# Altium PCB THIETBINHIPTIM.PcbDoc
Units mm, origin at the board's own origin, x right, y up, seen from the top; angles counter-clockwise.
Board outline 52.45 x 30.1 mm, 2 copper layers (Top Layer, Bottom Layer); 28 components, 23 nets, 176 pads, 23 vias.
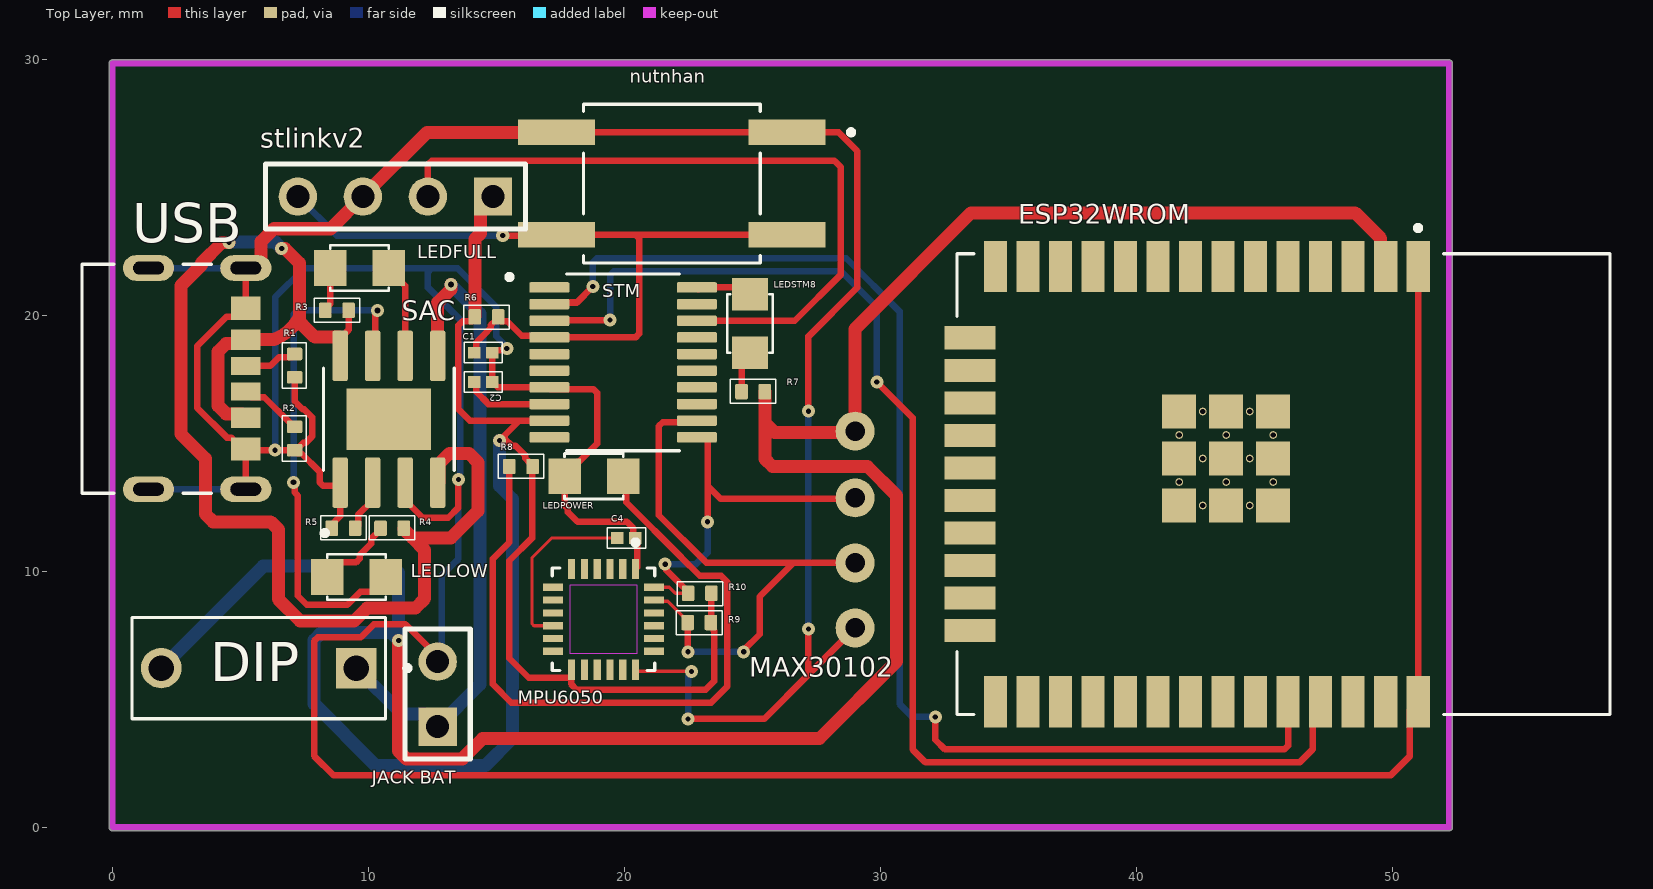
[diagram p0: Top Layer view]
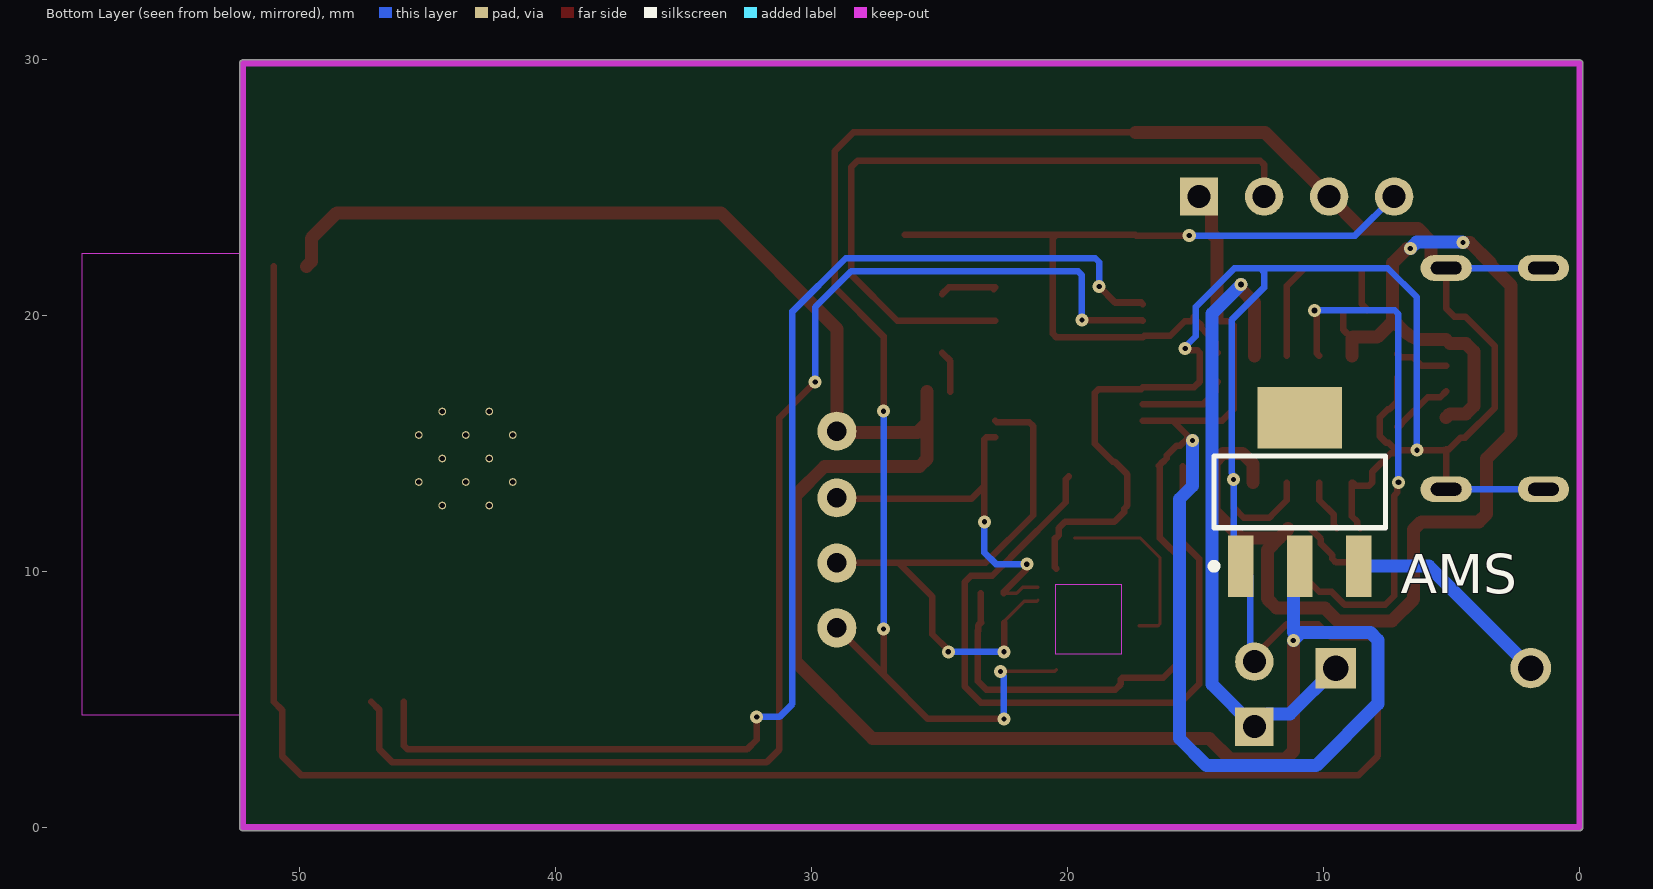
[diagram p1: Bottom Layer view, seen from below]
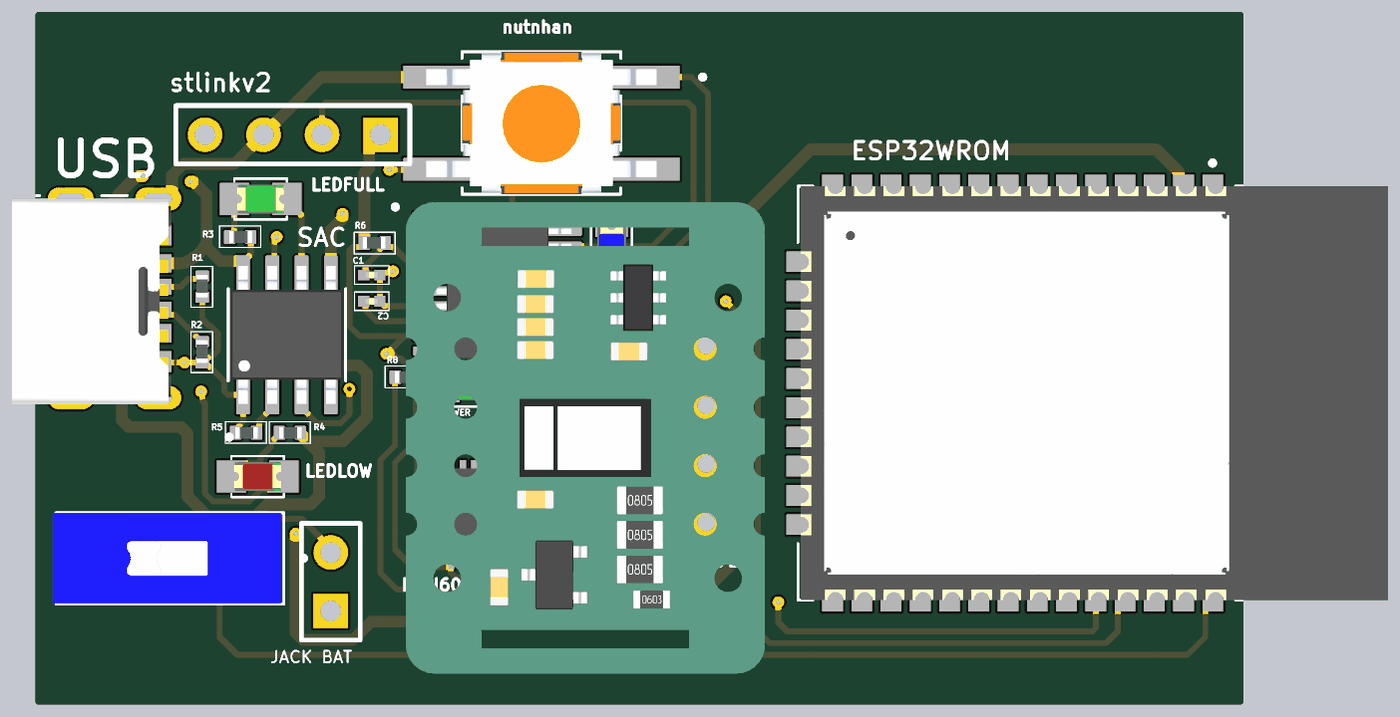
[diagram p2: 3D render of the assembled board from above, using the file's embedded part models]

## Layer stack, top to bottom
Top Solder: solder mask 0.0102, Solder Resist, Dk 3.5
Top Layer: signal copper 0.0356
Dielectric 1: dielectric 0.32, FR-4, Dk 4.8
Bottom Layer: signal copper 0.0356
Bottom Solder: solder mask 0.0102, Solder Resist, Dk 3.5

## Board outline
-0.127,0 ccw(c0,0) 0,-0.127 52.197,-0.127 ccw(c52.197,0) 52.324,0 52.324,29.845 ccw(c52.197,29.845) 52.197,29.972 0,29.972 ccw(c0,29.845) -0.127,29.845

## Design rules (kind name [scope] priority, off if disabled: settings)
Clearance [All] p1: gap=0.254 ignorepadtopadclearanceinfootprint=FALSE except(0: Arc-Hole Track-Hole SMDPad-Hole THPad-Hole Via-Hole Fill-Hole Poly-Hole Region-Hole Text-Hole)
PolygonConnect [All] p1: connectstyle=Relief reliefconductorwidth=0.254 reliefentries=4 polygonreliefangle="90 Angle" airgapwidth=0.254
RoutingVias [All] p1: holewidth=0.203 width=0.508 viastyle="Through Hole" minholewidth=0.203 minwidth=0.508 maxholewidth=0.203 maxwidth=0.508
SolderMaskExpansion [All] p1: expansion=0.102 istentingtop=FALSE
Width [All] p1: maxlimit=0.508 minlimit=0.127 preferedwidth=0.254 minimp=50.000000 maximp=50.000000 favimp=50.000000
30 further rules are at their usual default settings.

## Components (designator, comment, footprint, x,y, rotation, side; value= is the part's Value field where it differs from the comment)
AMS "AMS1117-3.3V" SOT223 10.922,13.102 r180 bottom value="AMS1117-3.3V SOT223"
C1 "100nF" "Cap 0201" 14.478,18.542 r0 top
C2 "1uF" "Cap 0201" 14.478,17.399 r180 top
C4 "0.1uF" "Cap 0201" 20.066,11.303 r0 top
DIP "DS01-254-S-01BE" SW_DS01-254-S-01BE 5.715,6.223 r90 top
ESP32WROM "ESP32 WROOM 32" ESP32-WROOM-32D 45.731,13.408 r270 top
"JACK BAT" "Header 2" HDR1X2 12.7,3.937 r90 top (schematic designator "jack bat")
LEDFULL "LED 0805" LED-0805-Green 10.795,21.844 r180 top
LEDLOW "LED 0805" LED-0805-Red 10.668,9.779 r180 top
LEDPOWER "LED 0805" LED-0805-Green 19.939,13.716 r180 top
LEDSTM8 "LED 0805" LED-0805-Blue 24.892,18.542 r90 top
MAX30102 "Component_1" PCBComponent_1 29,15.475 r0 top (schematic designator max)
MPU6050 "MPU-6050" QFN50P400X400X95-24N 19.177,8.128 r270 top
nutnhan "TL6700AF160QG" SW_TL6700AF160QG 21.844,25.146 r180 top
R1 "5.1K" "RES 0402" 7.112,18.034 r90 top
R2 "5.1K" "RES 0402" 7.112,15.187 r90 top
R3 "1K" "RES 0402" 8.763,20.193 r0 top
R4 "1K" "RES 0402" 10.922,11.684 r0 top
R5 "1.2K" "RES 0402" 9.017,11.684 r0 top
R6 "10k" "RES 0402" 14.605,19.939 r180 top
R7 "820" "RES 0402" 25.019,17.018 r0 top
R8 "1K" "RES 0402" 15.949,14.097 r0 top
R9 "4K7" "RES 0402" 22.913,8.001 r180 top
R10 "4K7" "RES 0402" 22.934,9.144 r180 top
SAC "TP4056" SOP127P600X175-9N 10.795,15.94 r90 top
stlinkv2 "Header 4" HDR1X4 14.859,24.638 r180 top
STM "STM8S003F3P6" SOP65P640X120-20N 19.939,18.161 r0 top
USB "UJC-HP-3-SMT-TR" CUI_UJC-HP-3-SMT-TR 5.207,17.526 r270 top (schematic designator J1)

## Footprints (in the part's own frame and the unit in brackets; to place one, negate y for a bottom-side part, rotate by r counter-clockwise, add the part's x,y. Pads: shape width x height; smd on the part's side, far side on the other; paste and mask are expansions set on the pad)
"Cap 0201" [mm] "Chip Capacitor, 2-Leads, Body 0.65x0.35mm, IPC Medium Density"
  rect 0.48x0.46 smd: 1(-0.35,0) 2(0.35,0)
  silkscreen extent -0.75,-0.4 0.75,0.4, body extent -0.3,-0.15 0.3,0.15, height 0.32
CUI_UJC-HP-3-SMT-TR [mm]
  rect 0.7x1.15 smd: A5(-0.5,0.005) B5(0.5,0.005)
  rect 0.8x1.15 smd: A9(1.52,0.005) B9(-1.52,0.005)
  rect 0.9x1.15 smd: A12(2.75,0.005) B12(-2.75,0.005)
  oval 1x2 hole 0.5 slot 1.2 at 90 deg: S1(-4.32,0) S2(4.32,0) S3(-4.32,-3.8) S4(4.32,-3.8)
  silkscreen extent -4.47,-6.4 4.47,-1.35, body extent -4.34,-6.35 4.6,0.55, height 3.23
ESP32-WROOM-32D [mm]
  rect 2x0.9 smd: 1(-8.5,5.26) 2(-8.5,3.99) 3(-8.5,2.72) 4(-8.5,1.45) 5(-8.5,0.18) 6(-8.5,-1.09) 7(-8.5,-2.36) 8(-8.5,-3.63) 9(-8.5,-4.9) 10(-8.5,-6.17) 11(-8.5,-7.44) 12(-8.5,-8.71) 13(-8.5,-9.98) 14(-8.5,-11.25) 25(8.5,-11.25) 26(8.5,-9.98) 27(8.5,-8.71) 28(8.5,-7.44) 29(8.5,-6.17) 30(8.5,-4.9) 31(8.5,-3.63) 32(8.5,-2.36) 33(8.5,-1.09) 34(8.5,0.18) 35(8.5,1.45) 36(8.5,2.72) 37(8.5,3.99) 38(8.5,5.26)
  rect 0.9x2 smd: 15(-5.715,-12.25) 16(-4.445,-12.25) 17(-3.175,-12.25) 18(-1.905,-12.25) 19(-0.635,-12.25) 20(0.635,-12.25) 21(1.905,-12.25) 22(3.175,-12.25) 23(4.445,-12.25) 24(5.715,-12.25)
  rect 1.33x1.33 smd: 39(-2.835,-0.405) 39(-2.835,-2.24) 39(-2.835,-4.075) 39(-1,-0.405) 39(-1,-2.24) 39(-1,-4.075) 39(0.835,-0.405) 39(0.835,-2.24) 39(0.835,-4.075)
  round 0.3 hole 0.2: 39(-2.835,-1.322) 39(-2.835,-3.157) 39(-1.917,-0.405) 39(-1.917,-2.24) 39(-1.917,-4.075) 39(-1,-1.322) 39(-1,-3.157) 39(-0.082,-0.405) 39(-0.082,-2.24) 39(-0.082,-4.075) 39(0.835,-1.322) 39(0.835,-3.157)
  Keep-Out Layer region: 9,6.45 -9,6.45 -9,12.75 9,12.75
  Keep-Out Layer region: 9,6.45 -9,6.45 -9,12.75 9,12.75
  silkscreen extent -10.1,-12.75 9,12.75, body extent -9,-12.62 9,12.88, height 3.2
HDR1X2 [mm] "Connector; Header; 2 Position"
  rect 1.5x1.5 hole 0.9: 1(0,0)
  round 1.5 hole 0.9: 2(2.54,0)
  silkscreen extent -1.27,-1.27 3.81,1.27
HDR1X4 [mm] "Connector; Header; 4 Position"
  rect 1.5x1.5 hole 0.9: 1(0,0)
  round 1.5 hole 0.9: 2(2.54,0) 3(5.08,0) 4(7.62,0)
  silkscreen extent -1.27,-1.27 8.89,1.27
LED-0805-Blue [mil]
  rect 50x55 smd: 1(0,0) 2(90,0)
  silkscreen extent 0,-35 90,35, body extent 5,-25 85,25, height 43
LED-0805-Green [mil]
  rect 50x55 smd: 1(0,0) 2(90,0)
  silkscreen extent 0,-35 90,35, body extent 5,-25 85,25, height 43
LED-0805-Red [mil]
  rect 50x55 smd: 1(0,0) 2(90,0)
  silkscreen extent 0,-35 90,35, body extent 5,-25 85,25, height 43
PCBComponent_1 [mil]
  round 60 hole 30: 1(0,0) 2(0,-102.55) 3(0,-202.55) 4(0,-302.55)
  body extent -514,-562 101,245, height 217
QFN50P400X400X95-24N [mm]
  rect 0.79x0.28 smd: 1(-1.97,1.25) 2(-1.97,0.75) 3(-1.97,0.25) 4(-1.97,-0.25) 5(-1.97,-0.75) 6(-1.97,-1.25) 13(1.97,-1.25) 14(1.97,-0.75) 15(1.97,-0.25) 16(1.97,0.25) 17(1.97,0.75) 18(1.97,1.25)
  rect 0.28x0.79 smd: 7(-1.25,-1.97) 8(-0.75,-1.97) 9(-0.25,-1.97) 10(0.25,-1.97) 11(0.75,-1.97) 12(1.25,-1.97) 19(1.25,1.97) 20(0.75,1.97) 21(0.25,1.97) 22(-0.25,1.97) 23(-0.75,1.97) 24(-1.25,1.97)
  Keep-Out Layer region: 1.35,-1.3 -1.35,-1.3 -1.35,1.3 1.35,1.3
  silkscreen extent -3.1,-2 2,2, body extent -2,-2 2,2, height 0.93
"RES 0402" [mm]
  rrect20% 0.49x0.6 smd: 1(-0.455,0) 2(0.455,0)
  silkscreen extent -0.89,-0.46 0.89,0.48, body extent -0.47,-0.25 0.53,0.25, height 0.32
SOP65P640X120-20N [mm]
  rrect25% 1.56x0.41 smd: 1(-2.88,2.925) 2(-2.88,2.275) 3(-2.88,1.625) 4(-2.88,0.975) 5(-2.88,0.325) 6(-2.88,-0.325) 7(-2.88,-0.975) 8(-2.88,-1.625) 9(-2.88,-2.275) 10(-2.88,-2.925) 11(2.88,-2.925) 12(2.88,-2.275) 13(2.88,-1.625) 14(2.88,-0.975) 15(2.88,-0.325) 16(2.88,0.325) 17(2.88,0.975) 18(2.88,1.625) 19(2.88,2.275) 20(2.88,2.925)
  silkscreen extent -4.54,-3.45 2.2,3.45, body extent -3.2,-3.25 3.2,3.25, height 1.23
SOP127P600X175-9N [mm]
  rrect25% 1.97x0.6 smd: 1(-2.475,1.905) 2(-2.475,0.635) 3(-2.475,-0.635) 4(-2.475,-1.905) 5(2.475,-1.905) 6(2.475,-0.635) 7(2.475,0.635) 8(2.475,1.905)
  rect 2.413x3.302 smd paste-3: 9(0,0)
  silkscreen extent -4.54,-2.55 2,2.6, body extent -3,-2.45 3,2.45, height 1.75
SOT223 [mm]
  rect 1x2.4 smd: 1(-2.3,-2.9) 2(0,-2.9) 3(2.3,-2.9)
  rect 3.3x2.4 smd: 4(0,2.9)
  silkscreen extent -3.48,-3.02 3.35,1.4, body extent -3.25,-3.56 3.25,3.4, height 1.68
SW_DS01-254-S-01BE [mm]
  rect 1.58x1.58 / inner round 1.58 / far side rect 1.58x1.58 hole 1: 1A(0,-3.81)
  round 1.58 hole 1: 1B(0,3.81)
  silkscreen extent -1.98,-5.9 1.98,4.95, body extent -1.98,-4.83 1.98,5.07, height 5.18
SW_TL6700AF160QG [mm]
  rect 3x1 smd: 1(-4.5,-2) 2(4.5,-2) 3(-4.5,2) 4(4.5,2)
  silkscreen extent -7.1,-3.1 3.45,3.1, body extent -5,-3.1 5,3.1, height 3.5

## Part data
AMS: library part "AMS1117 SMD", "Dán", Chung_Loai=Dán, Don_Vi=Con, Ma_Hang=MH000596
C1 C2 C4: library part "Cap 0201", "Capacitor SMD 0201"
DIP: "1 Position, Through Hole, 2.54 mm Pitch, Raised Slide Actuator, Flat Bottom, Short Pin, DIP Switch", Package=None, Check_prices=https://www.snapeda.com/parts/DS01-254-S-01BE/Same+Sky/view-part/?ref=eda, MF="Same Sky", MP=DS01-254-S-01BE, SnapEDA_Link=https://www.snapeda.com/parts/DS01-254-S-01BE/Same+Sky/view-part/?ref=snap
"JACK BAT": "Header, 2-Pin", LatestRevisionDate=17-Jul-2002, LatestRevisionNote="Re-released for DXP Platform.", Publisher="Altium Limited"
LEDFULL LEDPOWER: library part "LED 0805 Xanh La", "Dán", Chung_Loai=Dán, Don_Vi=Con, Ma_Hang=MH002326, Ten_Linh_Kien="LED 0805 Màu Xanh Lá (Green)"
LEDLOW: library part "LED 0805 Do", "Dán", Chung_Loai=Dán, Don_Vi=Con, Ma_Hang=MH000897, Ten_Linh_Kien="LED 0805 Màu Đỏ (Red)"
LEDSTM8: library part "LED 0805 Xanh Duong", "Dán", Chung_Loai=Dán, Don_Vi=Con, Ma_Hang=MH002327, Ten_Linh_Kien="LED 0805 Màu Xanh Dương (Blue)"
MPU6050: "MPU-6050 series Accelerometer, Gyroscope, 3 Axis Sensor Evaluation Board", Package="QFN-24 InvenSense", Check_prices=https://www.snapeda.com/parts/MPU-6050/TDK+InvenSense/view-part/?ref=eda, MF="TDK InvenSense", MP=MPU-6050, SnapEDA_Link=https://www.snapeda.com/parts/MPU-6050/TDK+InvenSense/view-part/?ref=snap
nutnhan USB: Package=None, Availability=Unavailable, Price=None
  nutnhan: MP=TL6700AF160QG
  USB: MP=UJC-HP-3-SMT-TR
R1 R2 R3 R4 R5 R7 R8 R9 R10: library part "RES 0402", "RES SMD 0402", Manufacturer="Vishay Dale", Manufacturer Part Number=CRCW040210K0FKED, Operating Temperature="-55°C ~ 155°C", Package / Case="0402 (1005 Metric)", Power (Watts)="0.063W, 1/16W", Resistance (Ohms)=10k, Supplier Part Number 1=541-10.0KLCT-ND, Temperature Coefficient=±100ppm/°C, Tolerance=±1%, Category=Resistors, ComponentLink1Description=http://www.vishay.com/docs/20035/dcrcwe3.pdf, ComponentLink1URL=http://www.vishay.com/docs/20035/dcrcwe3.pdf, Composition="Thick Film", Features="Automotive AEC-Q200", Height="0.016\" (0.40mm)", Number of Terminations=2, Packaging="Cut Tape (CT)", Pricing 1="10=0.083, 50=0.0444, 200=0.0255, 1000=0.0174 (USD)", RoHS="RoHS Compliant", Size / Dimension="0.039\" L x 0.020\" W (1.00mm x 0.50mm)", Stock 1=2392462, Supplier 1=Digi-Key, Supplier Device Package="0402 (1005 Metric)"
R6: library part "RES 0402", "RES SMD 0402", Manufacturer="Vishay Dale", Manufacturer Part Number=CRCW040210K0FKED, Operating Temperature="-55°C ~ 155°C", Package / Case="0402 (1005 Metric)", Power (Watts)="0.063W, 1/16W", Supplier Part Number 1=541-10.0KLCT-ND, Temperature Coefficient=±100ppm/°C, Tolerance=±1%, Category=Resistors, ComponentLink1Description=http://www.vishay.com/docs/20035/dcrcwe3.pdf, ComponentLink1URL=http://www.vishay.com/docs/20035/dcrcwe3.pdf, Composition="Thick Film", Features="Automotive AEC-Q200", Height="0.016\" (0.40mm)", Number of Terminations=2, Packaging="Cut Tape (CT)", Pricing 1="10=0.083, 50=0.0444, 200=0.0255, 1000=0.0174 (USD)", Resistance (Ohms)=10k, RoHS="RoHS Compliant", Size / Dimension="0.039\" L x 0.020\" W (1.00mm x 0.50mm)", Stock 1=2392462, Supplier 1=Digi-Key, Supplier Device Package="0402 (1005 Metric)"
SAC: "Complete single cell Li-Ion battery with a constant current / constant voltage linear charger", Package=Package, Availability="Not in stock", Check_prices=https://www.snapeda.com/parts/TP4056/NanJing+Top+Power+ASIC+Corp./view-part/?ref=eda, MF="NanJing Top Power ASIC Corp.", MP=TP4056, Price=None, SnapEDA_Link=https://www.snapeda.com/parts/TP4056/NanJing+Top+Power+ASIC+Corp./view-part/?ref=snap
stlinkv2: "Header, 4-Pin", LatestRevisionDate=17-Jul-2002, LatestRevisionNote="Re-released for DXP Platform.", Publisher="Altium Limited"
STM: "STM8 series Microcontroller IC 8-Bit 16MHz 8KB (8K x 8) FLASH 20-TSSOP", Package="TSSOP-20 STMicroelectronics", Check_prices=https://www.snapeda.com/parts/STM8S003F3P6/STMicroelectronics/view-part/?ref=eda, MF=STMicroelectronics, MP=STM8S003F3P6, SnapEDA_Link=https://www.snapeda.com/parts/STM8S003F3P6/STMicroelectronics/view-part/?ref=snap

## Via types
v1: diameter 0.508, hole 0.203, Top Layer to Bottom Layer, 20 vias
v2: diameter 0.508, hole 0.229, Top Layer to Bottom Layer, 3 vias

## Nets (pads, with @x,y where several pads share a name; then routed paths per layer and width w, separated by ;. In a path a pad name is that pad's centre, name@x,y a point inside that pad or via, vN(x,y) a via of type N, cw(c..) or ccw(c..) an arc to the next point about the centre after c; other vN are vias at no path point)
NetAMS_1: "JACK BAT.2" AMS.1 C1.2 C2.1 C4.2 ESP32WROM.1 ESP32WROM.38 LEDPOWER.2 MAX30102.4 MPU6050.1 MPU6050.18 nutnhan.1 nutnhan.2 R1.1 R2.1 R5.1 SAC.1 SAC.3 stlinkv2.3 STM.7 USB.A12 USB.B12 USB.S1 USB.S2 USB.S3 USB.S4 | length 215
  Top Layer w0.127: MPU6050.18 20.489,6.096 v1(22.606,6.096)
  Top Layer w0.254: USB.S2 5.207,14.771 USB.A12 ; USB.S1 5.207,20.281 USB.B12 4.889,19.953 4.459,19.953 3.302,18.796 3.302,16.395 4.472,15.225 4.638,15.225 5.087,14.776 USB.A12 ; R2.1 v1(6.35,14.732) 5.256,14.732 USB.A12 ; R1.1 7.112,16.637 7.422,16.327 7.483,16.327 7.793,16.016 7.793,15.268 7.541,15.016 7.451,15.016 R2.1@7.167,14.732 ; R2.1@7.23,14.614 7.371,14.614 8.085,13.9 8.085,13.484 8.234,13.335 8.717,13.335 8.847,13.465 SAC.1 8.89,12.157 8.68,11.947 8.68,11.802 R5.1 ; SAC.3 11.43,12.78 11.937,12.273 12.111,12.099 13.114,12.099 13.508,12.493 v1(13.508,13.589) ; 12.7,6.477 12.7,6.677 11.439,7.938 10.209,7.938 9.701,7.429 8.023,7.429 7.874,7.281 7.874,2.794 8.636,2.032 49.911,2.032 50.668,2.789 50.668,4.585 ESP32WROM.38 ESP32WROM.1 ; v1(15.399,18.701) 15.331,18.701 15.274,18.645 14.931,18.645 C1.2 C2.1 14.838,17.399 15.051,17.186 STM.7 17.123,17.122 18.774,17.122 18.923,16.973 18.923,14.986 18.224,14.287 18.161,14.287 17.653,13.779 17.653,12.573 17.78,12.446 17.78,12.319 18.161,11.938 20.09,11.938 20.337,11.691 20.337,11.406 20.44,11.303 20.491,11.303 20.491,10.162 MPU6050.1 ; nutnhan.2 nutnhan.1 27.344,27.146 28.353,27.146 29.083,26.416 29.083,21.082 27.178,19.177 v1(27.178,16.256) ; v1(22.479,4.239) 25.448,4.239 27.178,5.969 ; v1(27.178,7.747) 27.178,5.969 ; MAX30102.4@28.956,7.747 27.178,5.969
  Top Layer w0.508: USB.S1 5.574,21.846 5.801,22.073 5.801,22.879 6.302,23.38 8.521,23.38 stlinkv2.3 12.287,27.146 nutnhan.2
  Bottom Layer w0.254: USB.S4 USB.S2 ; USB.S3 USB.S1 ; v1(6.35,14.732) 6.35,20.701 7.488,21.839 12.463,21.839 ; 12.7,6.477 12.849,6.626 12.849,9.829 AMS.1 13.508,10.488 v1@13.508,13.472 ; v1(13.508,13.589) 13.557,13.638 13.557,13.817 13.589,13.85 13.589,19.812 12.319,21.082 12.319,21.695 12.463,21.839 ; v1(15.399,18.701) 15.399,18.77 14.986,19.184 14.986,20.329 13.476,21.839 12.463,21.839 ; v1(22.479,4.239) 22.479,5.9 22.606,6.027 v1(22.606,6.096) ; v1(27.178,7.747) v1(27.178,16.256)
NetAMS_2: AMS.2 ESP32WROM.2 MAX30102.1 MPU6050.13 R6.2 R7.2 R8.2 R9.1 R10.1 stlinkv2.1 STM.9 | length 137.5
  Top Layer w0.254: R6.2@14.159,19.948 14.159,19.893 14.032,19.766 13.67,19.766 13.507,19.603 13.507,16.338 13.959,15.886 15.886,15.886 ; v1(15.113,15.113) 15.251,15.251 15.319,15.319 ; R8.2 16.383,14.076 16.383,11.303 15.494,10.414 15.494,6.604 16.256,5.842 17.851,5.842 17.906,5.787 17.906,5.605 18.129,5.382 23.162,5.382 23.495,5.715 23.495,7.679 23.486,7.688 23.486,7.883 R9.1 23.379,8.012 23.379,9.133 R10.1 ; R8.2@16.432,14.124 16.286,14.27 16.269,14.27 16.12,14.419 16.12,14.526 15.868,14.778 15.733,14.913 15.588,14.913 15.319,15.182 15.319,15.319 ; STM.9 15.886,15.886 ; 15.319,15.319 15.886,15.886
  Top Layer w0.508: v1(11.176,7.302) 11.176,2.977 11.474,2.679 13.66,2.679 14.458,3.477 27.607,3.477 30.607,6.477 30.607,12.972 29.482,14.097 25.772,14.097 25.474,14.395 25.474,15.801 ; R6.2@14.159,19.948 14.159,22.984 14.363,23.188 14.363,24.142 stlinkv2.1 ; R7.2 25.474,15.801 ; ESP32WROM.2 49.525,22.104 49.525,23.002 48.524,24.003 33.528,24.003 29,19.475 MAX30102.1 28.956,15.432 25.843,15.432 25.474,15.801
  Bottom Layer w0.508: AMS.2 11.168,9.956 11.168,8.966 11.176,8.958 11.176,7.62 ; v1(11.176,7.302) 10.858,7.62 8.172,7.62 7.874,7.322 7.874,4.826 10.287,2.413 14.561,2.413 15.621,3.473 15.621,12.827 15.113,13.335 v1(15.113,15.113)
NetAMS_3: AMS.3 DIP.1B | length 8.4
  Bottom Layer w0.508: DIP.1B 5.884,10.202 AMS.3
NetC1_1: C1.1 nutnhan.3 nutnhan.4 R6.1 stlinkv2.4 STM.4 | length 31.4
  Top Layer w0.254: C1.1 14.207,18.621 14.207,18.941 14.524,19.258 14.776,19.51 14.776,19.617 14.925,19.766 14.942,19.766 R6.1@15.06,19.884 ; R6.1 R6.1@15.06,19.884 ; v1(15.24,23.114) 17.312,23.114 nutnhan.4 20.415,23.146 ; nutnhan.3 20.415,23.146 ; R6.1@15.06,19.884 15.178,19.766 15.413,19.766 15.979,19.2 16.995,19.2 STM.4 20.425,19.136 20.574,19.285 20.574,22.987 20.415,23.146
  Bottom Layer w0.254: stlinkv2.4 8.763,23.114 v1(15.24,23.114)
NetC2_2: C2.2 STM.8 | length 3.5
  Top Layer w0.254: C2.2 14.207,17.32 14.207,17.011 14.682,16.536 STM.8
NetC4_1: C4.1 MPU6050.10 | length 7.1
  Top Layer w0.127: MPU6050.10 16.457,7.878 16.383,7.952 16.383,10.541 17.145,11.303 C4.1
NetDIP_1A: "JACK BAT.1" DIP.1A SAC.5 | length 25.5
  Top Layer w0.508: SAC.5 12.7,20.495 13.213,21.007 v2(13.213,21.204)
  Bottom Layer w0.508: DIP.1A 11.315,4.433 12.204,4.433 12.7,3.937 14.351,5.588 14.351,20.066 v2(13.213,21.204)
NetESP32WROM_34: ESP32WROM.34 STM.2 | length 49.4
  Top Layer w0.254: STM.2 17.123,20.5 18.136,20.5 v1(18.757,21.121) ; v1(32.131,4.318) 32.131,3.429 32.512,3.048 45.762,3.048 45.911,3.197 ESP32WROM.34
  Bottom Layer w0.254: v1(18.757,21.121) 18.757,22.076 18.906,22.225 28.658,22.225 30.734,20.149 30.734,4.826 31.242,4.318 v1(32.131,4.318)
NetESP32WROM_35: ESP32WROM.35 STM.3 | length 51.1
  Top Layer w0.254: STM.3 17.072,19.799 19.418,19.799 v1(19.431,19.812) ; v1(29.845,17.399) 31.242,16.002 31.242,3.048 31.75,2.54 46.355,2.54 46.863,3.048 46.863,4.59 ESP32WROM.35
  Bottom Layer w0.254: v1(19.431,19.812) 19.431,21.568 19.58,21.717 28.448,21.717 29.845,20.32 v1(29.845,17.399)
NetJ1_A5: R1.2 USB.A5 | length 2.1
  Top Layer w0.254: USB.A5 6.168,18.026 6.513,18.371 6.994,18.371 R1.2
NetJ1_A9: R3.2 R4.2 SAC.4 SAC.8 USB.A9 USB.B9 | length 50.5
  Top Layer w0.254: SAC.8@8.89,19.1 9.218,19.428 R3.2
  Top Layer w0.508: v1(4.554,22.842) 4.278,22.842 3.472,22.037 3.472,21.96 2.667,21.155 2.667,15.367 3.631,14.403 3.631,12.236 3.929,11.938 6.179,11.938 6.477,11.64 6.477,8.914 7.326,8.064 9.438,8.064 9.946,8.572 11.831,8.572 12.192,8.934 12.192,10.832 11.721,11.303 ; USB.B9@5.057,18.9 4.443,18.9 4.129,18.586 4.129,16.466 4.443,16.152 5.066,16.152 USB.A9 ; USB.B9 6.175,19.046 ccw(c6.174,19.554) 6.358,19.08 ccw(c5.705,20.749) 7.304,19.941 ; v1(6.606,22.606) 6.731,22.606 7.304,22.033 7.304,19.941 ; 7.304,19.843 7.304,19.941 ; 7.415,19.636 7.905,19.146 8.844,19.146 8.89,19.1 SAC.8 ; R4.2 11.377,11.647 11.721,11.303 ; SAC.4@12.746,13.465 12.746,14.196 13.155,14.605 13.926,14.605 14.27,14.261 14.27,12.357 13.216,11.303 11.721,11.303
  Bottom Layer w0.508: v1(4.554,22.842) 4.566,22.854 6.358,22.854 v1(6.606,22.606)
NetJ1_B5: R2.2 USB.B5 | length 2.5
  Top Layer w0.254: USB.B5 5.435,16.803 5.929,16.803 6.939,15.793 6.939,15.76 7.057,15.642 R2.2
NetLEDFULL_1: LEDFULL.1 SAC.6 | length 3.7
  Top Layer w0.254: LEDFULL.1 10.795,21.78 11.43,21.145 SAC.6
NetLEDFULL_2: LEDFULL.2 R3.1 | length 1.7
  Top Layer w0.254: R3.1 8.308,20.248 8.509,20.449 LEDFULL.2
NetLEDLOW_1: LEDLOW.1 SAC.7 | length 20.3
  Top Layer w0.254: v2(7.069,13.479) 7.118,13.43 7.118,13.084 7.239,12.963 7.239,9.05 7.589,8.7 9.175,8.7 9.683,9.207 10.16,9.207 10.668,9.716 LEDLOW.1 ; SAC.7 10.256,18.511 10.256,20.097 v2(10.352,20.193)
  Bottom Layer w0.254: v2(7.069,13.479) 7.069,20.044 7.218,20.193 v2(10.352,20.193)
NetLEDLOW_2: LEDLOW.2 R4.1 | length 3.1
  Top Layer w0.254: LEDLOW.2 8.382,9.842 8.89,10.351 9.507,10.351 9.652,10.495 9.652,10.635 10.098,11.081 10.098,11.26 10.467,11.629 R4.1
NetLEDPOWER_1: LEDPOWER.1 R8.1 | length 28.9
  Top Layer w0.254: R8.1 15.494,11.132 14.859,10.497 14.859,5.588 15.573,4.874 23.372,4.874 24.015,5.517 24.015,9.573 23.763,9.825 22.932,9.825 22.225,10.532 22.225,10.541 20.066,12.7 20.066,13.589 LEDPOWER.1
NetLEDSTM8_1: LEDSTM8.1 R7.1 | length 1.7
  Top Layer w0.254: R7.1 24.564,18.214 LEDSTM8.1
NetLEDSTM8_2: LEDSTM8.2 STM.20 | length 2.3
  Top Layer w0.254: STM.20@22.883,21.022 STM.20 24.634,21.086 LEDSTM8.2
Netmax_2: MAX30102.2 MPU6050.24 R10.2 STM.11 | length 16.4
  Top Layer w0.127: MPU6050.24 21.75,9.378 21.984,9.144 R10.2
  Top Layer w0.254: v1(21.585,10.282) 21.634,10.234 21.634,10.044 22.479,9.199 R10.2 ; v1(23.241,11.938) 23.241,13.335 ; MAX30102.2@28.956,12.827 23.749,12.827 23.241,13.335 ; STM.11@23.163,15.236 STM.11 STM.11@23.163,15.236 ; STM.11@23.163,15.236 STM.11@23.241,15.158 ; STM.11@23.163,15.236 STM.11@23.241,15.158 ; 23.241,13.335 23.241,14.814 ; 23.241,14.814 STM.11@23.241,15.158 ; 23.241,14.814 STM.11@23.241,15.158
  Bottom Layer w0.254: v1(21.585,10.282) 21.59,10.287 22.791,10.287 23.241,10.737 v1(23.241,11.938)
Netmax_3: MAX30102.3 MPU6050.23 R9.2 STM.12 | length 22.8
  Top Layer w0.127: MPU6050.23 21.19,8.835 21.678,8.835 22.458,8.056 R9.2
  Top Layer w0.254: R9.2 22.468,7.99 22.468,6.869 v1(22.479,6.858) ; STM.12 22.755,15.822 21.485,15.822 21.336,15.673 21.336,12.192 23.184,10.344 26.6,10.344 ; v1(24.65,6.858) 24.65,6.927 25.273,7.55 25.273,9.017 26.6,10.344 ; MAX30102.3 28.986,10.344 26.6,10.344
  Bottom Layer w0.254: v1(22.479,6.858) v1(24.65,6.858)
NetR5_2: R5.2 SAC.2 | length 2.1
  Top Layer w0.254: R5.2 9.59,11.802 9.59,12.21 10.16,12.78 SAC.2
Netstlinkv2_2: stlinkv2.2 STM.18 | length 28.1
  Top Layer w0.254: stlinkv2.2 12.319,25.886 12.468,26.035 28.194,26.035 28.448,25.781 28.448,21.59 26.644,19.786 STM.18
pads on no net: AMS.4 ESP32WROM.3 ESP32WROM.4 ESP32WROM.5 ESP32WROM.6 ESP32WROM.7 ESP32WROM.8 ESP32WROM.9 ESP32WROM.10 ESP32WROM.11 ESP32WROM.12 ESP32WROM.13 ESP32WROM.14 ESP32WROM.15 ESP32WROM.16 ESP32WROM.17 ESP32WROM.18 ESP32WROM.19 ESP32WROM.20 ESP32WROM.21 ESP32WROM.22 ESP32WROM.23 ESP32WROM.24 ESP32WROM.25 ESP32WROM.26 ESP32WROM.27 ESP32WROM.28 ESP32WROM.29 ESP32WROM.30 ESP32WROM.31 ESP32WROM.32 ESP32WROM.33 ESP32WROM.36 ESP32WROM.37 ESP32WROM.39 MPU6050.2 MPU6050.3 MPU6050.4 MPU6050.5 MPU6050.6 MPU6050.7 MPU6050.8 MPU6050.9 MPU6050.11 MPU6050.12 MPU6050.14 MPU6050.15 MPU6050.16 MPU6050.17 MPU6050.19 MPU6050.20 MPU6050.21 MPU6050.22 SAC.9 STM.1 STM.5 STM.6 STM.10 STM.13 STM.14 STM.15 STM.16 STM.17 STM.19

## Keep-outs
Keep-Out Layer:
  lines w0.254: 0,24.892 0,24.511 ; 0,24.511 0,0 52.197,0 52.197,29.845 51.308,29.845 49.784,29.845 46.609,29.845 0,29.845 0,24.511

## Text inside footprints (layer, text, board x,y; h text height)
ESP32WROM: Mechanical 13 "ANTENNA" at 54.731,19.408 h1.78 r270